# Altium PCB OTA.PcbDoc
Units mil, origin at the board's own origin, x right, y up, seen from the top; angles counter-clockwise.
Board outline 2001 x 1047 mil, 2 copper layers (Top Layer, Bottom Layer); 16 components, 14 nets, 80 pads, 7 vias.
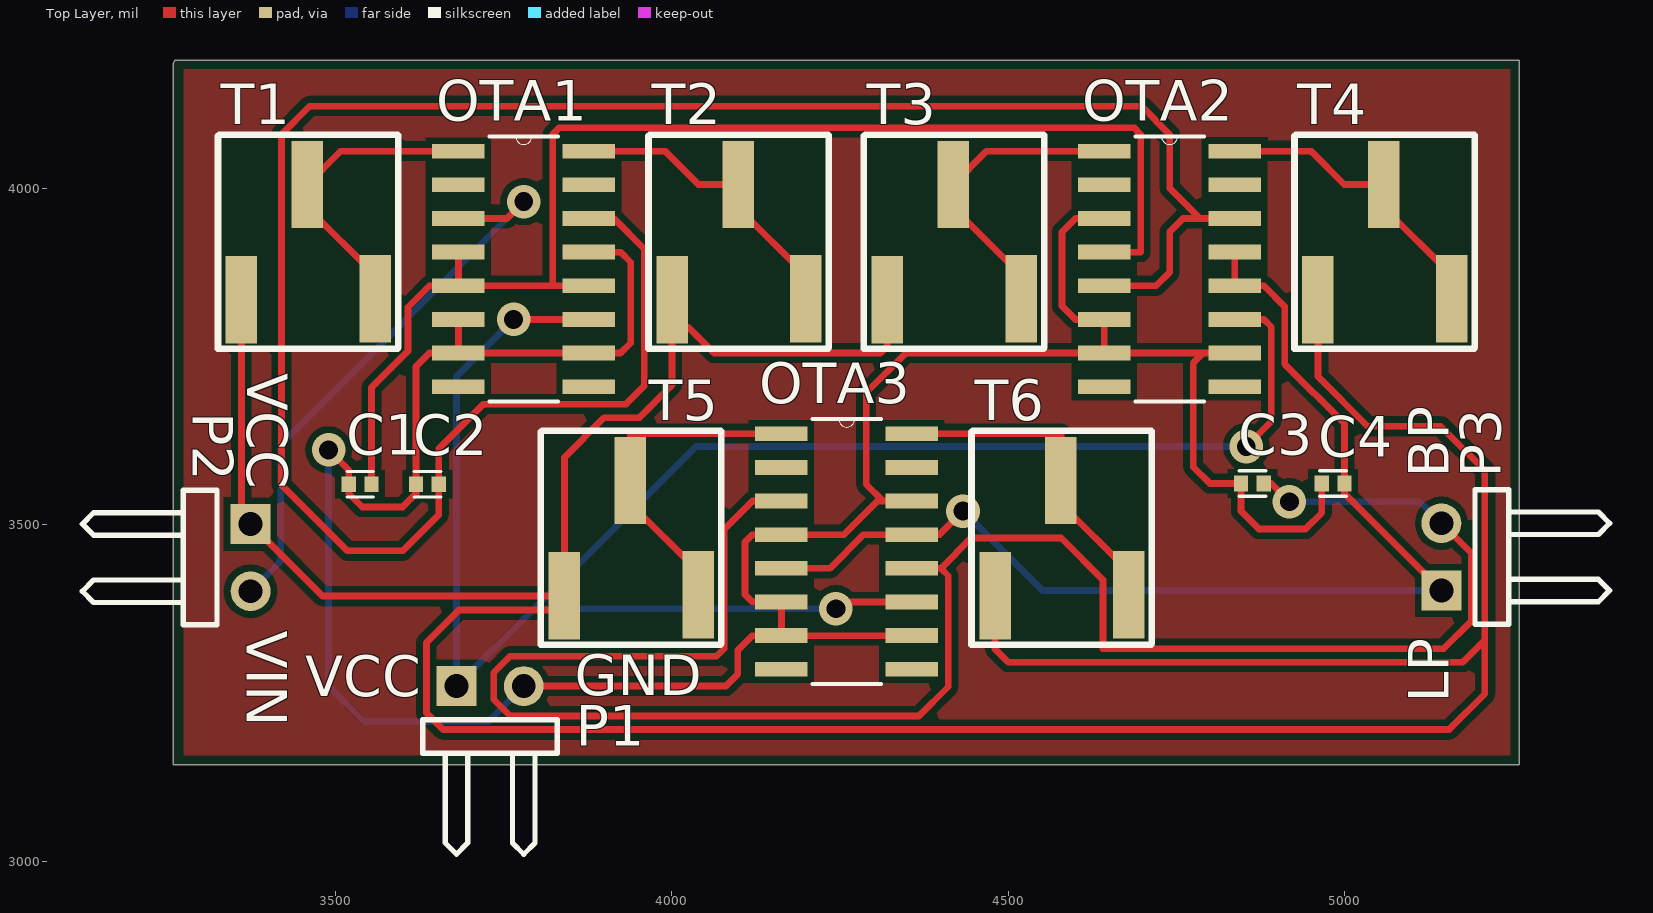
[diagram p0: Top Layer view]
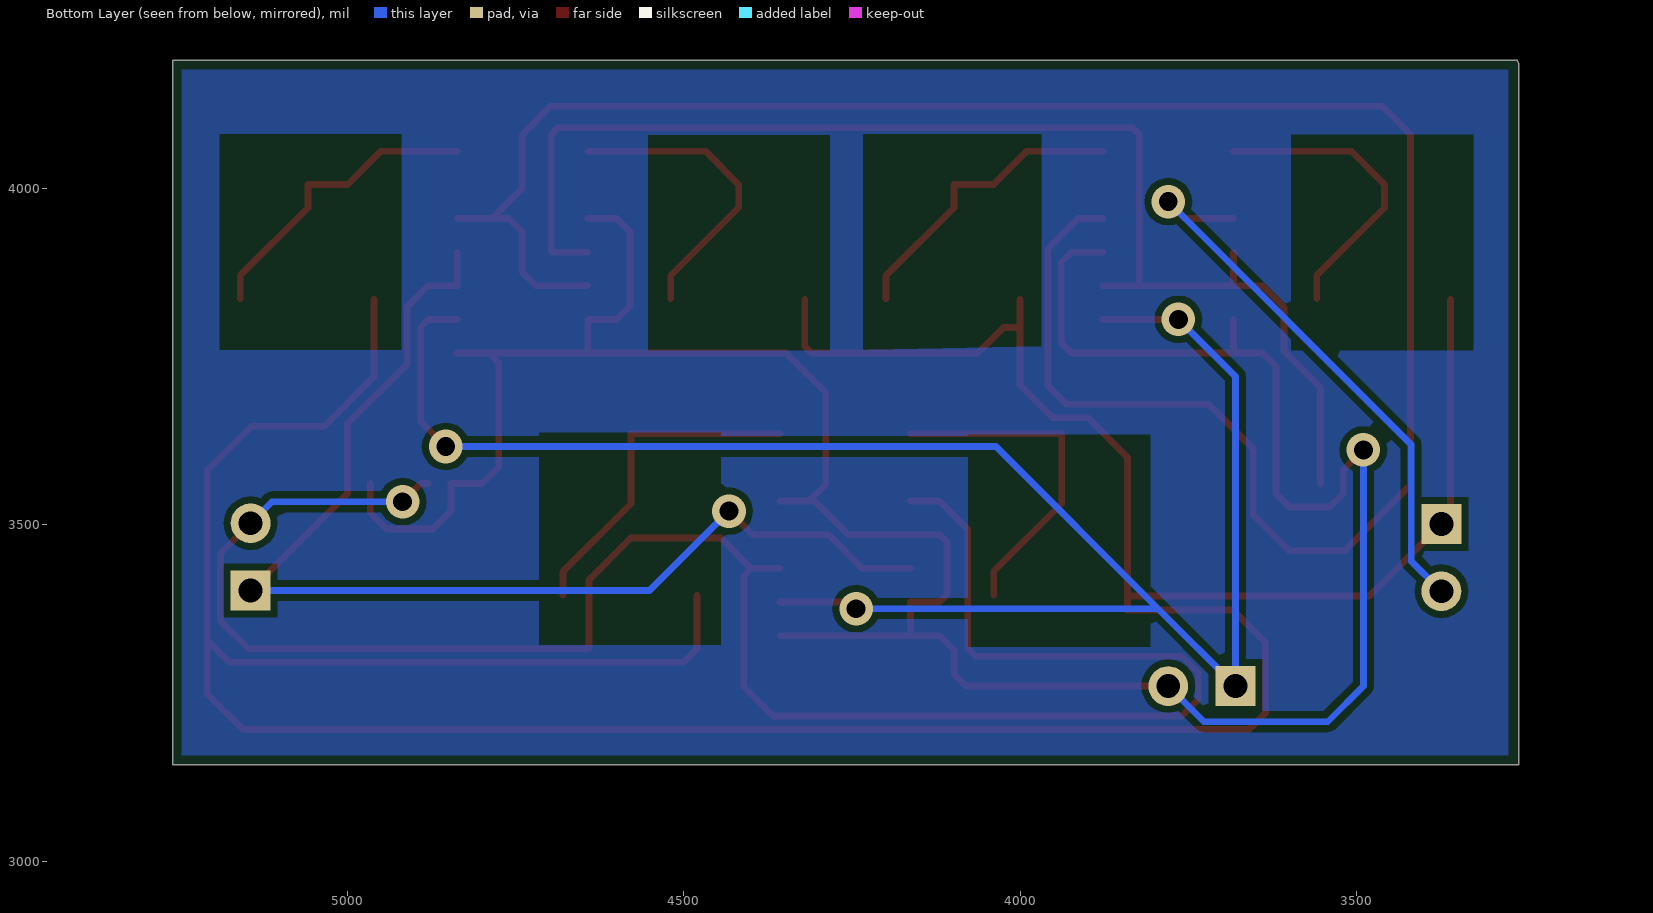
[diagram p1: Bottom Layer view, seen from below]

## Layer stack, top to bottom
Top Layer: signal copper 1.4
Dielectric: dielectric 12.6, FR-4, Dk 4.8
Bottom Layer: signal copper 1.4

## Board outline
3261,4190 5260,4190 5260,3143 3259,3143 3259,4185

## Design rules (kind name [scope] priority, off if disabled: settings)
Clearance [All] p1: gap=10
ComponentClearance [All] p1: gap=10 collisioncheckmode=3 verticalgap=10
PolygonConnect [All] p1: connectstyle=Relief reliefconductorwidth=10 reliefentries=4 polygonreliefangle="90 Angle"
RoutingVias [All] p1: holewidth=28 width=50 viastyle="Through Hole" minholewidth=28 minwidth=50 maxholewidth=28 maxwidth=50
SolderMaskExpansion [All] p1: expansion=4
TestPointUsage [All] p1: valid=0 allowmultiple=FALSE
Testpoint [All] p1: side=15 testpointundercomponent=TRUE minsize=40 maxsize=100 preferedsize=60 minholesize=0 maxholesize=40 preferedholesize=32 testpointgrid=1 style=1023 order=0-112345678
Width [All] p1: maxlimit=10 minlimit=10 preferedwidth=10
18 further rules are at their usual default settings.

## Components (designator, comment, footprint, x,y, rotation, side; value= is the part's Value field where it differs from the comment)
C1 "CAP" _C*CAPC1005X55N_CC0402C100K5GACAUTO_CPrimary_C 3536.93,3560 r0 top
C2 "CAP" _C*CAPC1005X55N_CC0402C100K5GACAUTO_CPrimary_C 3636.93,3560 r0 top
C3 "CAP" _C*CAPC1005X55N_CC0402C100K5GACAUTO_CPrimary_C 4863,3561 r0 top
C4 "CAP" _C*CAPC1005X55N_CC0402C100K5GACAUTO_CPrimary_C 4983,3561 r0 top
OTA1 "LM13700M" LM13700LM13700MLM13700LM13700MLM13700PrimaryLM13700 3780,3880 r0 top (schematic designator U1)
OTA2 "LM13700M" LM13700LM13700MLM13700LM13700MLM13700PrimaryLM13700 4740,3880 r0 top (schematic designator U2)
OTA3 "LM13700M" LM13700LM13700MLM13700LM13700MLM13700PrimaryLM13700 4260,3460 r0 top (schematic designator U3)
P1 "" HDR1X2H 3680,3260 r0 top
P2 "" HDR1X2H 3374,3501 r270 top
P3 "" HDR1X2H 5144,3402 r90 top
T1 "1M" PCBComponent_1 3460,3920 r0 top
T2 "1M" PCBComponent_1 4100,3920 r0 top
T3 "1M" PCBComponent_1 4420,3920 r0 top
T4 "1M" PCBComponent_1 5060,3920 r0 top
T5 "1M" PCBComponent_1 3940,3480 r0 top
T6 "1M" PCBComponent_1 4580,3480 r0 top

## Footprints (in the part's own frame and the unit in brackets; to place one, negate y for a bottom-side part, rotate by r counter-clockwise, add the part's x,y. Pads: shape width x height; smd on the part's side, far side on the other; paste and mask are expansions set on the pad)
_C*CAPC1005X55N_CC0402C100K5GACAUTO_CPrimary_C [mm]
  rect 0.54x0.6 smd: 1(-0.43,0) 2(0.43,0)
  silkscreen extent -0.5,-0.48 0.5,0.48
HDR1X2H [mm] "Connector; Header; 2 Position; Right Angle"
  rect 1.5x1.5 hole 0.9: 1(0,0)
  round 1.5 hole 0.9: 2(2.54,0)
  silkscreen extent -1.27,-6.35 3.81,-1.27
LM13700LM13700MLM13700LM13700MLM13700PrimaryLM13700 [mil]
  rect 78x22 smd: 1(-97,175) 2(-97,125) 3(-97,75) 4(-97,25) 5(-97,-25) 6(-97,-75) 7(-97,-125) 8(-97,-175) 9(97,-175) 10(97,-125) 11(97,-75) 12(97,-25) 13(97,25) 14(97,75) 15(97,125) 16(97,175)
  silkscreen extent -51,-197 51,197
PCBComponent_1 [mil]
  rect 46.85x129.92 smd: 1(-1.5,85.5) 2(-99.5,-85.5) 3(99.5,-84.5)
  silkscreen extent -134,-158 134,160

## Part data
C1 C2 C3 C4: library part C0402C100K5GACAUTO, "CAPACITOR CERAMIC 10 PF 10% TOL 50V C0G 0402"
OTA1 OTA2 OTA3: "Dual Operational Transconductance Amplifier with Linearizing Diodes and Buffers 16-SOIC 0 to 70"
P1 P2 P3: library part "Header 2H", "Header, 2-Pin, Right Angle"
T1 T2 T3 T4 T5 T6: library part Component_1

## Via types
v1: diameter 50, hole 28, Top Layer to Bottom Layer, 7 vias

## Nets (pads, with @x,y where several pads share a name; then routed paths per layer and width w, separated by ;. In a path a pad name is that pad's centre, name@x,y a point inside that pad or via, vN(x,y) a via of type N, cw(c..) or ccw(c..) an arc to the next point about the centre after c; other vN are vias at no path point)
NetC1_1: C1.1 C2.1 C3.1 C4.1 OTA1.6 OTA1.7 OTA1.10 OTA1.13 OTA2.3 OTA2.6 OTA2.7 OTA2.10 OTA3.4 OTA3.6 OTA3.7 OTA3.10 OTA3.14 P1.2 | length 4256.7
  Top Layer w10: v1(3490,3611) 3520,3581 C1.1 3520,3546 3540,3526 3600,3526 3620,3546 C2.1 3620,3735 3640,3755 OTA1.7 ; OTA1.6 OTA1.7 ; P1.2 4080.43,3260 4097.93,3277.49 4097.93,3312.93 4120,3335 OTA3.7 ; OTA1.13 3924,3905 3939,3890 3939,3770 3924,3755 OTA1.10 OTA1.7 ; OTA3.10 OTA3.7 ; OTA3.14 4314,3535 ; OTA2.3 4600,3955 4580,3935 4580,3825 4600,3805 OTA2.6 OTA2.7 ; OTA2.10 4790,3755 ; C4.1 4966.07,3517.51 4941.99,3493.42 4872.65,3493.42 4846.07,3520 C3.1 4800,3561 4775,3586 4775,3740 4790,3755 ; OTA3.7 OTA3.6 4120,3385 4109,3396 4109,3474 4120,3485 OTA3.4 4256,3485 4306,3535 4314,3535 ; 4314,3535 4289,3560 4289,3696 4348,3755 OTA2.7 ; OTA2.7 4790,3755
  Bottom Layer w10: v1(3490,3611) 3490,3260 3543,3207 3727,3207 P1.2
NetC1_2: C1.2 OTA1.4 OTA1.5 OTA1.12 OTA2.4 | length 1954
  Top Layer w10: C1.2 3553.86,3703.86 3608,3758 3608,3823 3640,3855 OTA1.5 ; OTA1.4 OTA1.5 ; OTA1.12 3823,3855 ; OTA2.4 4697,3905 4697,4080 4687,4090 3833,4090 3823,4080 3823,3855 ; OTA1.5 3823,3855
NetC2_2: C2.2 OTA1.14 OTA2.5 OTA2.14 | length 3333.1
  Top Layer w10: OTA1.14 3914,3955 3959,3910 3959,3706 3932,3679 3720,3679 3653.86,3612.86 C2.2 3653.86,3514.86 3600,3461 3518,3461 3420,3559 3420,4080 3462,4122 4698,4122 4740,4080 4740,4000 4785,3955 ; OTA2.5 4720,3855 4740,3875 4740,3935 4760,3955 4785,3955 ; OTA2.14 4785,3955
NetC3_2: C3.2 OTA3.3 OTA3.12 P3.2 | length 3008.7
  Top Layer w10: OTA3.3 4120,3535 4077.93,3492.93 4077.93,3315.54 4066.92,3304.53 3760,3304.53 3735.47,3280 3735.47,3240 3760,3215.47 4367.47,3215.47 4411,3259 4411,3424 4400,3435 ; OTA3.12 4400,3435 ; C3.2 4891,3561 v1(4918,3534) ; P3.2 5188.53,3457.47 5188.53,3357 5147.07,3315.54 4641.07,3315.54 4641.07,3417.93 4579,3480 4445,3480 4400,3435
  Bottom Layer w10: v1(4918,3534) 5112,3534 P3.2
NetC4_2: C4.2 OTA2.12 OTA2.13 OTA3.5 OTA3.13 P3.1 | length 1720.4
  Top Layer w10: OTA3.5 4235,3435 4285,3485 OTA3.13 4398,3485 v1(4433,3520) ; OTA2.13 OTA2.12 4880,3855 4911,3824 4911,3738.93 4999.93,3650 C4.2 4999.93,3546.07 P3.1
  Bottom Layer w10: v1(4433,3520) 4551,3402 P3.1
NetP1_1: OTA1.11 OTA2.11 OTA3.11 P1.1 | length 2831.7
  Top Layer w10: v1(3765,3805) OTA1.11 ; v1(4244,3375) 4254,3385 OTA3.11 ; OTA2.11 4880,3805 4891,3794 4891,3653 v1(4854,3616)
  Bottom Layer w10: v1(3765,3805) 3680,3720 P1.1 3795,3375 ; v1(4244,3375) 3795,3375 ; v1(4854,3616) 4036,3616 3795,3375
NetP2_1: P2.1 T1.2 T2.2 T3.2 T4.2 T5.2 T6.2 | length 5333.8
  Top Layer w10: T1.2 3360.5,3514.5 3481,3394 T5.2@3840.5,3394 ; T2.2@4000.5,3793 4025,3793 4063,3755 4310,3755 4320.5,3765.5 T3.2 ; T2.2 4000.5,3707.5 3952,3659 3899.5,3659 3840.5,3600 3840.5,3373 3683.94,3373 3635.47,3324.53 3635.47,3220 3660,3195.47 5155.47,3195.47 5208.53,3248.53 5208.53,3580.47 5143,3646 5034.5,3646 4960.5,3720 T4.2 ; T6.2 4480.5,3315 4499.96,3295.54 5175.76,3295.54 5208.53,3328.31
NetP2_2: OTA1.3 P2.2 | length 854.5
  Top Layer w10: OTA1.3 3755,3955 v1(3780,3980)
  Bottom Layer w10: P2.2 3419,3446 3419,3619 v1(3780,3980)
NetT1_1: OTA1.1 T1.1 T1.3 | length 456.8
  Top Layer w10: T1.3 3559.5,3870 3458.5,3971 T1.1 3508,4055 OTA1.1
NetT2_1: OTA1.16 T2.1 T2.3 | length 453.8
  Top Layer w10: OTA1.16 3990,4055 4039.5,4005.5 T2.1 4098.5,3971 4199.5,3870 T2.3
NetT3_1: OTA2.1 T3.1 T3.3 | length 456.8
  Top Layer w10: T3.3 4519.5,3870 4418.5,3971 T3.1 4468,4055 OTA2.1
NetT4_1: OTA2.16 T4.1 T4.3 | length 453.8
  Top Layer w10: OTA2.16 4950,4055 4999.5,4005.5 T4.1 5058.5,3971 5159.5,3870 T4.3
NetT5_1: OTA3.1 T5.1 T5.3 | length 505.8
  Top Layer w10: T5.3 4039.5,3430 3938.5,3531 T5.1 3938.5,3635 OTA3.1
NetT6_1: OTA3.16 T6.1 T6.3 | length 502.8
  Top Layer w10: OTA3.16 4578.5,3635 T6.1 4578.5,3531 4679.5,3430 T6.3
pads on no net: OTA1.2 OTA1.8 OTA1.9 OTA1.15 OTA2.2 OTA2.8 OTA2.9 OTA2.15 OTA3.2 OTA3.8 OTA3.9 OTA3.15

## Polygon pours and split planes (outlines as drawn)
no net on Top Layer "gnd" (solid, pour order 1000): 3275,4177 5246,4177 5246,3157 3275,3157
no net on Bottom Layer "gnd" (solid, pour order 1000): 3275,4176 5246,4176 5246,3157 3275,3157

## Other copper
Top Layer:
  pour cut-out: 3970,4082.5 4230,4077.5 4230,3762.5 3966,3762.5 3970,4082.5
  pour cut-out: 4283.96,4078.52 4553.96,4078.52 4551.89,3759.06 4286.04,3761.48 4283.96,4078.52
  pour cut-out: 4930,4075 5190,4077.5 5190,3762.5 4919.07,3757.04 4930,4075 4917,4077.5
  pour cut-out: 3808.04,3635.73 4078.04,3635.73 4075.96,3316.27 3803,3324 3808.04,3635.73
  pour cut-out: 4441.79,3636.66 4714.79,3636.66 4714.79,3321.66 4441.21,3316.34 4441.79,3636.66
  pour cut-out: 3326.04,4079.73 3596.04,4079.73 3593.96,3760.27 3328.11,3759.27 3326.04,4079.73
Bottom Layer:
  pour cut-out: 3327.07,4079.5 3597.07,4079.5 3597.07,3759.5 3327.07,3759.5 3327.07,4079.5
  pour cut-out: 3973.5,4080 4233.5,4080 4233.5,3760 3968.5,3765 3968.5,4080
  pour cut-out: 4282.93,4078.79 4552.93,4078.79 4552.93,3758.79 4282.93,3758.79 4282.93,4078.79
  pour cut-out: 4920,4080 5190,4080 5190,3760 4920,3760 4920,4080
  pour cut-out: 3807,3633.5 4077,3633.5 4077,3318.5 3807,3318.5 3807,3633.5
  pour cut-out: 4444.79,3636.66 4714.79,3636.66 4714.79,3321.66 4444.79,3321.66 4444.79,3636.66

## Silkscreen, mask and mechanical layers (free items; w line width, h text height)
Top Overlay:
  text "VCC" at 3369,3725 h60 r270
  text "BP" at 5155,3570 h60 r90
  text "VIN" at 3368,3342 h60 r270
  text "GND" at 3856,3246 h60
  text "VCC" at 3455,3245 h60
  text "LP" at 5155,3235 h60 r90
Mechanical 1:
  lines w10: 3270,3153 5250,3153 5250,4180 3270,4180 3270,3153